# EAGLE board Magic Keys (EAGLE 7.1.0)
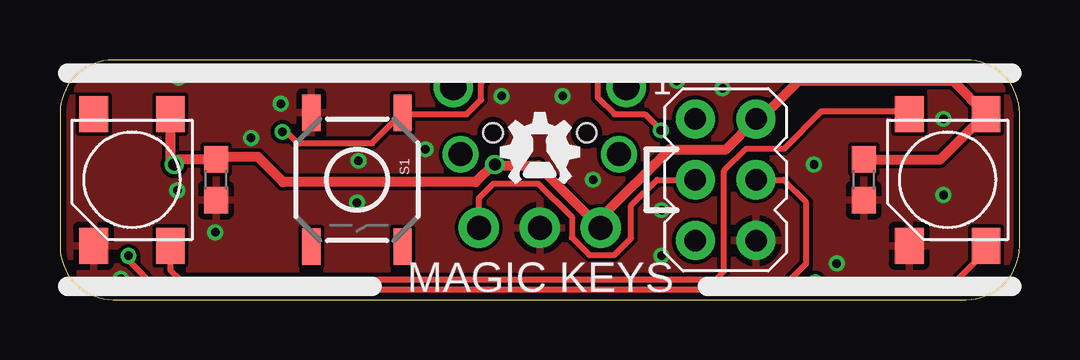
[diagram p0: board, top side]
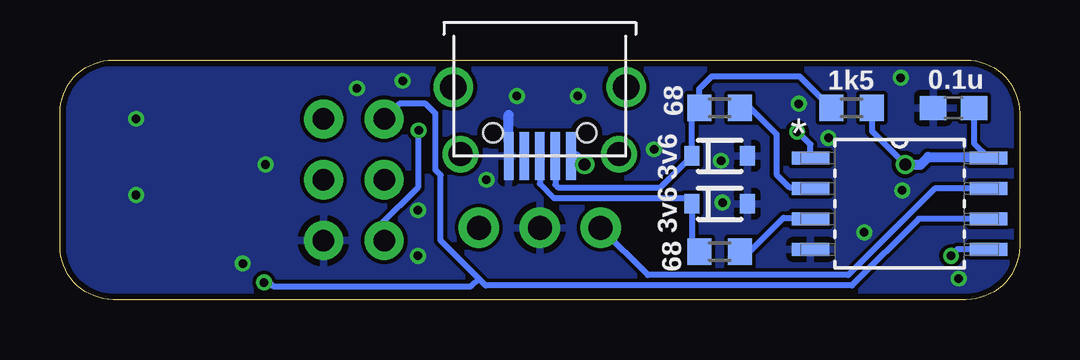
[diagram p1: board, bottom side, seen from below]

Size 40 x 10 mm. Coordinates in mm from the lower left corner, seen from the top.
Outline: 0,7.78 0,2.22 arc90 2.22,0 37.78,0 arc90 40,2.22 40,7.78 arc90 37.78,10 2.22,10 arc90 0,7.78
Copper layers (1*16): Top 0.035mm / dielectric 1.5mm / Bottom 0.035mm
Design rules "ITEADstudio_DRC": minimum track width 6mil, minimum drill 12mil, track to track 6mil, track to pad 6mil, pad to pad 6mil, via to via 6mil, smd to smd 0mil, copper to edge 10mil, drill to drill 10mil, minimum pad ring 10mil, minimum via ring 6mil, stop-mask expansion 2mil, vias tented up to drill 100mil, thermal gap 10mil

## Footprints (pad centres in the part's own frame; a part is rotated, then mirrored left to right if it is on the bottom)
C0603 = smd 1.1 x 1: 1 -0.85,0; 2 0.85,0
MICRO_USB_LEGS = smd 0.4 x 2: 1 -1.3,-0.075; 2 -0.65,-0.075; 3 0,-0.075; 4 0.65,-0.075; 5 1.3,-0.075 | drill 1.1: P$1 -3.6,2.8; P$2 3.6,2.8 | drill 1: P$3 -3.3,0; P$4 3.3,0 | hole 0.8: -1.95,0.9; 1.95,0.9
AVRISP = drill 0.9 pad 1.626: 1 -1.27,2.54; 2 1.27,2.54; 3 -1.27,0; 4 1.27,0; 5 -1.27,-2.54; 6 1.27,-2.54
R0603 = smd 1 x 1.1: 1 -0.85,0; 2 0.85,0
TACTILE-SWITCH-SMD = smd 1.524 x 0.762: 1 -2.794,1.905; 2 2.794,1.905; 3 -2.794,-1.905; 4 2.794,-1.905
SOIC127P798X216-8N = smd 1.549 x 0.533: 1 -3.708,1.905; 2 -3.708,0.635; 3 -3.708,-0.635; 4 -3.708,-1.905; 5 3.708,-1.905; 6 3.708,-0.635; 7 3.708,0.635; 8 3.708,1.905
SOD-323 = smd 0.63 x 0.83: 1 -1.15,0; 2 1.15,0
1PIN = drill 1 pad 1.676: P$1 0,0
WS2812 = smd 1.5 x 1.2: 1 -2.75,1.6; 2 -2.75,-1.6; 3 2.75,-1.6; 4 2.75,1.6

## Placement (x,y rotation side)
C1  0.1u  [C0603]  2.75,8 180 bottom
C2  0.1u  [C0603]  33.5,5 90 top
C3  0.1u  [C0603]  6.5,5 90 top
CN1  [MICRO_USB_LEGS]  20,6.06 0 bottom
ISP1  AVRISP-6  [AVRISP]  27.75,5 0 top
R1  68  [R0603]  12.5,8 180 bottom
R2  1k5  [R0603]  7,8 0 bottom
R3  68  [R0603]  12.5,2 180 bottom
S1  RST  [TACTILE-SWITCH-SMD]  12.38,5 270 top
U1  ATTINY85-20SU  [SOIC127P798X216-8N]  5,4 0 bottom
U$1  3v6  [SOD-323]  12.5,4 0 bottom
U$2  gnd  [1PIN]  20,3 0 top
U$3  3v6  [SOD-323]  12.5,6 0 bottom
U$4  sig  [1PIN]  17.46,3 0 top
U$5  5v  [1PIN]  22.54,3 0 top
U$6  WS2812  [WS2812]  37,5 270 top
U$7  WS2812  [WS2812]  3,5 270 top
U$8  [LOGO_3MM_SILK]  20,6.27 0 top

## Library data of the parts
C1-C3 ISP1 R1-R3 = adafruit
CN1 U$2 U$4-U$7 = OSH_Lab
S1 = OSH_Lab; PROD_ID: SWCH-08247
U1 = Atmel_By_element14_Batch_1-00; MPN: ATTINY85-20SU; OC_FARNELL: 1455164; OC_NEWARK: 58M3797; PACKAGE: SOIC-8; SUPPLIER: Atmel
U$1 U$3 = SparkFun-DiscreteSemi
U$8 = OSH_Lab-Art

## Nets
+5V: C1.1 C2.2 C3.2 CN1.5 ISP1.2 R2.2 U1.8 U$5.P$1 U$6.1 U$7.1
GND: C1.2 C2.1 C3.1 CN1.1 ISP1.6 S1.3 U1.4 U$1.2 U$2.P$1 U$3.2 U$6.3 U$7.3
MISO: ISP1.1 U1.6 U$6.4
MOSI: ISP1.4 U1.5
N$1: CN1.4 R1.2 R2.1 U$3.1
N$2: CN1.3 R3.2 U$1.1
N$3: R1.1 U1.2
N$4: R3.1 U1.3
N$6: U$6.2 U$7.4
RST: ISP1.5 S1.1 U1.1
SCK: ISP1.3 U1.7 U$4.P$1

## Tracks (layer width: path | path; a pad name or v marks a point on that pad's centre or on a via)
+5V  (via drill 0.5)
  Top 0.406: U$7.1 4.6,5.79 v4.76,5.63 4.97,5.85 C3.2 6.6,5.95 8.25,5.95 9.3,4.91 17.33,4.91 18.06,5.63 v18.13,5.63 18.16,5.63 18.19,5.6 19.94,5.6 U$5.P$1 22.54,3.41 25.4,6.27 27.75,6.27 ISP1.2 29.21,7.54 30.8,9.13 37.22,9.13 U$6.1 36.7,5.85 C2.2
  Bottom 0.254: C1.1 1.9,6.51 U1.8 | R2.2 6.15,7.03 v4.76,5.63
  Bottom 0.406: CN1.5 18.48,5.99 v18.13,5.63 | v4.76,5.63 4.12,5.63 3.81,5.95 1.34,5.95 U1.8
GND  (via drill 0.36)
  Bottom 0.406: 21.3,6.59 21.3,7.7
  other vias: 2.54,0.87 12.38,4.05 12.44,5.79 9.21,8.18 6.47,2.81 22.22,5 20.95,8.49 4.95,9.25 18.41,8.49 27.62,8.81 32.38,1.51 25.08,3.73 36.83,4.37 4.89,4.56 7.97,6.75 25.71,9.13 25.08,1.83 31.43,5.63 15.24,6.27 36.83,7.54
  pour Bottom: -1,11 41,11 41,-1 -1,-1
  pour Top: -1,11 41,11 41,-1 -1,-1
MISO  (via drill 0.36)
  Top 0.254: U$6.4 38.6,2.01 37.02,0.43 31.78,0.43 v31.49,0.71
  Bottom 0.254: U1.6 4.2,3.37 6.98,0.59 22.25,0.59 22.54,0.87 | 22.54,0.87 24.13,2.46 24.13,5.19 24.35,5.41 24.35,7.76 24.76,8.18 25.84,8.18 ISP1.1 | v31.49,0.71 31.27,0.71 31.11,0.55 22.86,0.55 22.54,0.87
MOSI  (via drill 0.36)
  Top 0.254: v2.86,1.83 2.86,1.63 4.06,0.43 30.03,0.43 31.11,1.51 31.11,4.05 30.16,5 ISP1.4
  Bottom 0.254: U1.5 2.59,2.1 v2.86,1.83
N$1
  Bottom 0.254: CN1.4 19.35,4.79 19.24,4.68 14.97,4.68 U$3.1 13.65,7.7 R1.2 13.35,8.79 12.82,9.32 9.17,9.32 R2.1
N$2
  Bottom 0.254: CN1.3 20,4.84 19.4,4.24 13.89,4.24 U$1.1 13.65,2.3 R3.2
N$3
  Bottom 0.254: R1.1 11.22,8 10.13,6.91 10.13,5.22 9.59,4.68 8.76,4.68 U1.2
N$4
  Bottom 0.254: R3.1 11.25,2 9.84,3.41 8.76,3.41 U1.3
N$6
  Top 0.254: U$7.4 4.6,1.22 4.98,0.84 27.33,0.84 27.68,1.19 27.68,5.38 28.6,6.3 30.19,6.3 31.75,7.86 35.29,7.86 U$6.2
RST  (via drill 0.36)
  Top 0.254: v9.27,7 9.43,7 9.9,6.52 13.02,6.52 S1.1 14.35,7.73 16.95,7.73 17.55,8.33 17.55,9 18.13,9.57 22.13,9.57 22.41,9.29 22.41,8.43 23.11,7.73 24.38,7.73 v25.05,7.06
  Bottom 0.254: U1.1 8.71,6.47 v9.27,7 | v25.05,7.06 25.08,7.06 25.08,4.68 26.67,3.09 26.67,2.65 ISP1.5
SCK
  Top 0.254: U$4.P$1 17.46,4.24 18.06,4.84 19.94,4.84 21.33,3.44 21.33,2.59 22.06,1.86 23.11,1.86 23.81,2.56 23.81,3.92 24.89,5 ISP1.3
  Bottom 0.254: U1.7 3.54,4.63 7.14,1.03 15.49,1.03 U$4.P$1

## Text on the board
tPlace: MAGIC KEYS